# Altium PCB Ampl89038.PcbDoc
Units mm, origin at the board's own origin, x right, y up, seen from the top; angles counter-clockwise.
Board outline 20 x 20 mm, 2 copper layers (Top Layer, Bottom Layer), stack 1 mm thick; 13 components, 8 nets, 133 pads, 0 vias.
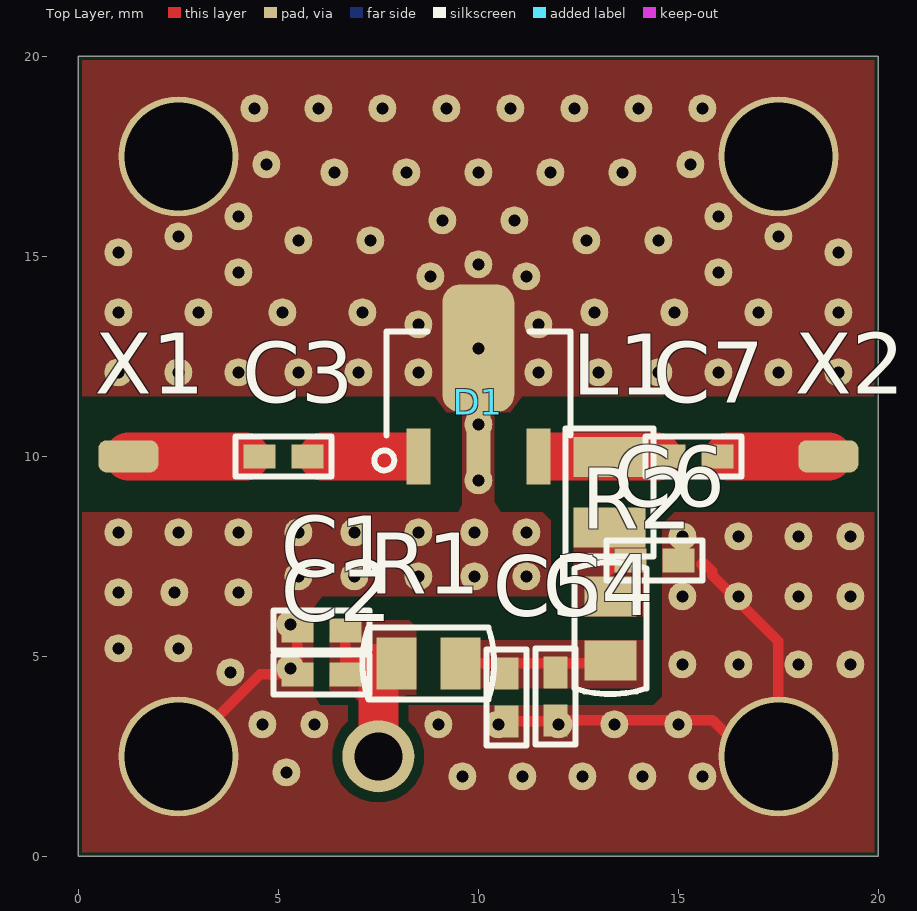
[diagram p0: Top Layer view]
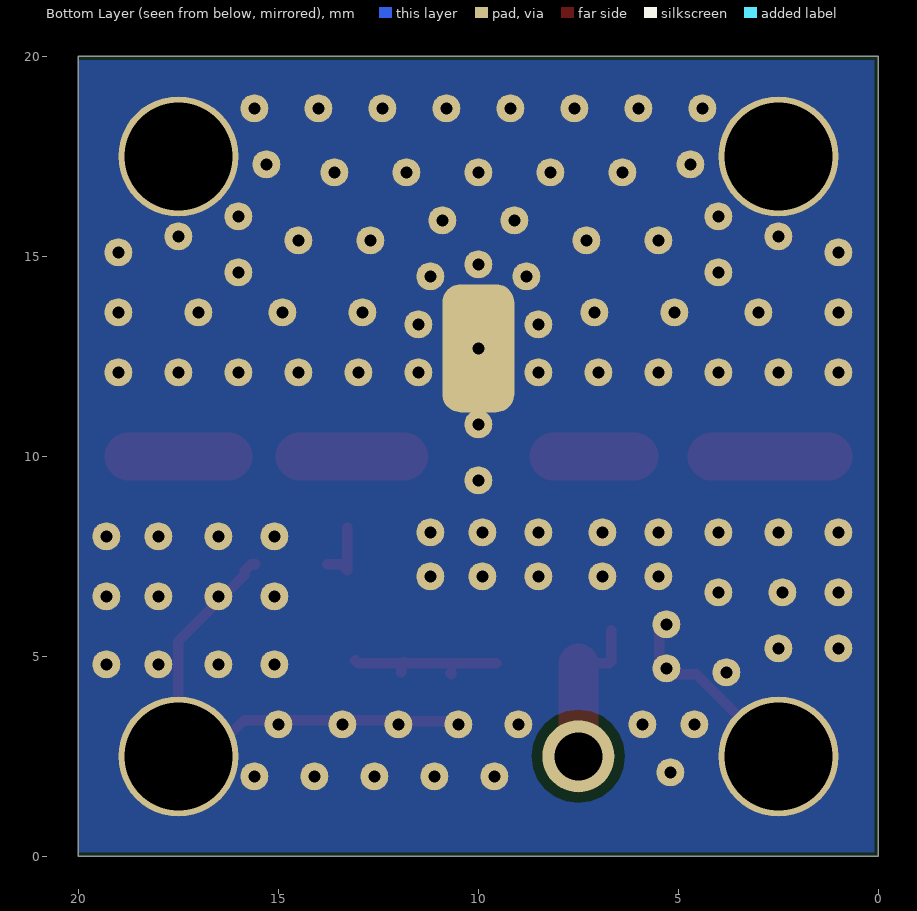
[diagram p1: Bottom Layer view, seen from below]

## Layer stack, top to bottom
Top Solder: solder mask 0.0102, Solder Resist, Dk 3.5
Top Layer: signal copper 0.05
Dielectric 1: dielectric 0.9, FR-4, Dk 4.8
Bottom Layer: signal copper 0.05
Bottom Solder: solder mask 0.0102, Solder Resist, Dk 3.5

## Board outline
0,0 0,20 20,20 20,0

## Design rules (kind name [scope] priority, off if disabled: settings)
AssemblyTestPointUsage AssemblyTestPointUsage_1 [All] p2:
AssemblyTestpoint AssemblyTestpoint_1 [All] p2: testpointundercomponent=TRUE minsize=1.016 maxsize=2.54 preferedsize=1.524 minholesize=0 maxholesize=1.016 preferedholesize=0.813 testpointgrid=0.025 usegrid=TRUE gridtolerance=0 allowsidetop=TRUE allowsidebottom=TRUE
Clearance [All] p1: gap=0.254 ignorepadtopadclearanceinfootprint=FALSE except(0: Arc-Hole Track-Hole SMDPad-Hole THPad-Hole Via-Hole Fill-Hole Poly-Hole Region-Hole Text-Hole)
Clearance Clearance_1 [All] p2: gap=0.254 ignorepadtopadclearanceinfootprint=FALSE except(0: Arc-Hole Track-Hole SMDPad-Hole THPad-Hole Via-Hole Fill-Hole Poly-Hole Region-Hole Text-Hole; 0.1: SMDPad-Poly SMDPad-Region THPad-Poly THPad-Region; 0.15: Track-Track Track-SMDPad SMDPad-SMDPad SMDPad-THPad SMDPad-Via THPad-THPad)
ComponentClearance ComponentClearance_1 [All] p2: gap=0.254 collisioncheckmode=3 verticalgap=0.254 showdistances=FALSE
DiffPairsRouting [All] p1: maxlimit=0.254 minlimit=0.254 mostfreqgap=0.254 substack1={E3139BEB-1D26-4D56-B641-86937DF22D5B} toplayer_{e3139beb-1d26-4d56-b641-86937df22d5b}_minwidth=0.381 toplayer_{e3139beb-1d26-4d56-b641-86937df22d5b}_maxwidth=0.381 toplayer_{e3139beb-1d26-4d56-b641-86937df22d5b}_prefwidth=0.381 bottomlayer_{e3139beb-1d26-4d56-b641-86937df22d5b}_minwidth=0.381 bottomlayer_{e3139beb-1d26-4d56-b641-86937df22d5b}_maxwidth=0.381 bottomlayer_{e3139beb-1d26-4d56-b641-86937df22d5b}_prefwidth=0.381 toplayer_minwidth=0.381 toplayer_maxwidth=0.381 toplayer_prefwidth=0.381 bottomlayer_minwidth=0.381 bottomlayer_maxwidth=0.381 bottomlayer_prefwidth=0.381 maxuncoupledlength=12.7
DiffPairsRouting DiffPairsRouting_1 [All] p2: maxlimit=0.254 minlimit=0.254 mostfreqgap=0.254 substack1={E3139BEB-1D26-4D56-B641-86937DF22D5B} toplayer_{e3139beb-1d26-4d56-b641-86937df22d5b}_minwidth=0.381 toplayer_{e3139beb-1d26-4d56-b641-86937df22d5b}_maxwidth=0.381 toplayer_{e3139beb-1d26-4d56-b641-86937df22d5b}_prefwidth=0.381 bottomlayer_{e3139beb-1d26-4d56-b641-86937df22d5b}_minwidth=0.381 bottomlayer_{e3139beb-1d26-4d56-b641-86937df22d5b}_maxwidth=0.381 bottomlayer_{e3139beb-1d26-4d56-b641-86937df22d5b}_prefwidth=0.381 toplayer_minwidth=0.381 toplayer_maxwidth=0.381 toplayer_prefwidth=0.381 bottomlayer_minwidth=0.381 bottomlayer_maxwidth=0.381 bottomlayer_prefwidth=0.381 maxuncoupledlength=12.7
FabricationTestPointUsage FabricationTestPointUsage_1 [All] p2: valid=0 allowmultiple=FALSE
FabricationTestpoint FabricationTestpoint_1 [All] p2: side=3 testpointundercomponent=TRUE minsize=1.016 maxsize=2.54 preferedsize=1.524 minholesize=0 maxholesize=1.016 preferedholesize=0.813 testpointgrid=0.025 allowsidetop=TRUE allowsidebottom=TRUE usegrid=TRUE gridtolerance=0
FanoutControl Fanout_LCC [IsLCC] p1: bgadir=Out bgaviamode=Centered fanoutstyle=Auto fanoutdirection=Alternating viagrid=0.025 // Fanout_LCC (Default Rule)
FanoutControl Fanout_BGA [IsBGA] p2: bgadir=Out bgaviamode=Centered fanoutstyle=Auto fanoutdirection=Alternating viagrid=0.025 // Fanout_BGA (Default Rule)
FanoutControl Fanout_Small [(CompPinCount < 5)] p3: bgadir=Out bgaviamode=Centered fanoutstyle=Auto fanoutdirection=OutThenIn viagrid=0.025 // Fanout_Small (Default Rule)
FanoutControl Fanout_SOIC [IsSOIC] p4: bgadir=Out bgaviamode=Centered fanoutstyle=Auto fanoutdirection=Alternating viagrid=0.025 // Fanout_SOIC (Default Rule)
FanoutControl Fanout_BGA_1 [IsBGA] p6: bgadir=Out bgaviamode=Centered fanoutstyle=Auto fanoutdirection=Alternating viagrid=0.025 // Fanout_BGA (Default Rule)
FanoutControl Fanout_LCC_1 [IsLCC] p7: bgadir=Out bgaviamode=Centered fanoutstyle=Auto fanoutdirection=Alternating viagrid=0.025 // Fanout_LCC (Default Rule)
FanoutControl Fanout_SOIC_1 [IsSOIC] p8: bgadir=Out bgaviamode=Centered fanoutstyle=Auto fanoutdirection=Alternating viagrid=0.025 // Fanout_SOIC (Default Rule)
FanoutControl Fanout_Small_1 [(CompPinCount < 5)] p9: bgadir=Out bgaviamode=Centered fanoutstyle=Auto fanoutdirection=OutThenIn viagrid=0.025 // Fanout_Small (Default Rule)
FanoutControl Fanout_Default_1 [All] p10: bgadir=Out bgaviamode=Centered fanoutstyle=Auto fanoutdirection=Alternating viagrid=0.025 // Fanout_Default (Default Rule)
Height Height_1 [All] p2: minheight=0 maxheight=25.4 prefheight=12.7
HoleSize HoleSize_1 [All] p2: absolutevalues=TRUE maxlimit=2.54 minlimit=0.025 maxpercent=80.000 minpercent=20.000
HoleToHoleClearance HoleToHoleClearance_1 [All] p2: gap=0.254 allowstackedmicrovias=TRUE
LayerPairs LayerPairs_1 [All] p2: enforce=TRUE
MinimumSolderMaskSliver MinimumSolderMaskSliver_1 [All] p2: minsoldermaskwidth=0.254
NetAntennae NetAntennae_1 [All] p2: netantennaetolerance=0
PasteMaskExpansion PasteMaskExpansion_1 [All] p2: expansion=0
PlaneClearance PlaneClearance_1 [All] p2: clearance=0.8
PlaneConnect [All] p1: planeconnectstyle=Direct reliefexpansion=0.508 reliefentries=4 reliefconductorwidth=0.254 reliefairgap=0.254
PlaneConnect PlaneConnect_1 [All] p2: planeconnectstyle=Direct reliefexpansion=0.508 reliefentries=4 reliefconductorwidth=0.254 reliefairgap=0.254
PolygonConnect [All] p1: connectstyle=Direct reliefconductorwidth=0.254 reliefentries=4 polygonreliefangle="90 Angle" airgapwidth=0.254
PolygonConnect PolygonConnect_1 [All] p2: connectstyle=Direct reliefconductorwidth=0.254 reliefentries=4 polygonreliefangle="90 Angle" airgapwidth=0.254
RoutingCorners RoutingCorners_1 [All] p2: cornerstyle=45-Degree minsetback=2.54 maxsetback=2.54
RoutingLayers RoutingLayers_1 [All] p2: top layer_v5=TRUE bottom layer_v5=TRUE
RoutingPriority RoutingPriority_1 [All] p2: routingpriority=0
RoutingTopology RoutingTopology_1 [All] p2: topology=Shortest
RoutingVias [All] p1: holewidth=0.711 width=1.27 viastyle="Through Hole" minholewidth=0.711 minwidth=1.27 maxholewidth=0.711 maxwidth=1.27
RoutingVias RoutingVias_1 [All] p2: holewidth=0.711 width=1.27 viastyle="Through Hole" minholewidth=0.711 minwidth=1.27 maxholewidth=0.711 maxwidth=1.27
ShortCircuit ShortCircuit_1 [All] p2: allowed=FALSE
SilkToBoardRegionClearance SilkToBoardRegionClearance_1 [All] p2:
SilkToSilkClearance SilkToSilkClearance_1 [All] p2: silktosilkclearance=0.254
SilkToSolderMaskClearance SilkToSolderMaskClearance_1 [IsPad] p2: minsilkscreentomaskgap=0.254 clearancetoexposedcopper=TRUE
SolderMaskExpansion [All] p1: expansion=0.102 istentingtop=FALSE
SolderMaskExpansion SolderMaskExpansion_1 [All] p2: expansion=0.102 istentingtop=FALSE
UnRoutedNet UnRoutedNet_1 [All] p2:
UnpouredPolygon UnpouredPolygon_1 [All] p2:
Width [All] p1: maxlimit=1.254 minlimit=0.254 preferedwidth=0.254 substack1={E3139BEB-1D26-4D56-B641-86937DF22D5B}
Width Width_08 [All] p2 off: maxlimit=0.8 minlimit=0.8 preferedwidth=0.8 substack1={E3139BEB-1D26-4D56-B641-86937DF22D5B}
Width Width_1 [All] p3 off: maxlimit=0.254 minlimit=0.254 preferedwidth=0.254 substack1={E3139BEB-1D26-4D56-B641-86937DF22D5B} checkconnectedcopper=TRUE
24 further rules are at their usual default settings.

## Components (designator, comment, footprint, x,y, rotation, side; value= is the part's Value field where it differs from the comment)
C1 "1000" CAPC1005N 6.075,5.65 r0 top value={Value}
C2 "10" CAPC1005N 6.075,4.55 r0 top value={Value}
C3 "1000" CAPC1005N 5.125,10 r0 top value={Value}
C4 "1000" CAPC1005N 11.925,4 r90 top value={Value}
C5 "10" CAPC1005N 10.7,3.975 r90 top value={Value}
C6 "1000" CAPC1005N 14.4,7.4 r180 top value={Value}
C7 "1000" CAPC1005N 15.375,10 r0 top value={Value}
D1 "SBB2089Z" SOT89-150P400X160-3N 10,11.8 r90 top
L1 "" INDC2012X16N 13.275,9.1 r90 top
R1 "15" RESC2012L 8.75,4.825 r0 top value={Value}
R2 "15" RESC2012L 13.3,5.7 r90 top value={Value}
X1 "22_SMA-50-0-15/111_NE" TP0.8X1.5 1.25,10 r0 top
X2 "22_SMA-50-0-15/111_NE" TP0.8X1.5 18.75,10 r0 top

## Footprints (in the part's own frame and the unit in brackets; to place one, negate y for a bottom-side part, rotate by r counter-clockwise, add the part's x,y. Pads: shape width x height; smd on the part's side, far side on the other; paste and mask are expansions set on the pad)
CAPC1005N [mm] "Chip Capacitor, Body 1.0x0.5mm, IPC Medium Density"
  rect 0.8x0.6 smd: 1(-0.6,0) 2(0.6,0)
  Top Layer pour cut-out: -0.2,0.5 -0.2,-0.5 0.2,-0.5 0.2,0.5
  silkscreen extent -1.2,-0.5 1.2,0.5, body extent -0.55,-0.3 0.55,0.3, height 0.6
INDC2012X16N [mm] "Chip Inductor, 2-Leads, Body 2,29x1,91mm, IPC Medium Density"
  rect 1x1.8 smd: 1(-0.88,0) 2(0.88,0)
  Top Layer pour cut-out: -0.4,0.9 -0.4,-0.9 0.4,-0.9 0.4,0.9
  silkscreen extent -1.6,-1.1 1.6,1.1, body extent -1.15,-0.95 1.14,0.96, height 1.6
RESC2012L [mm] "Chip Resistor, Body 2.0x1.3mm, IPC High Density"
  rect 1x1.3 smd: 1(-0.8,0) 2(0.8,0)
  Top Layer pour cut-out: -0.3,0.9 -0.3,-0.9 0.3,-0.9 0.3,0.9
  silkscreen extent -1.65,-0.9 1.65,0.9, body extent -1.07,-0.7 1.07,0.7, height 0.65
SOT89-150P400X160-3N [mm] "SOT89, 3-Leads, Body 4,50x2,50mm, Pitch 1,50mm, Lead Span 4,0mm, IPC Medium Density"
  rect 1.4x0.6 smd: 1(-1.8,1.5) 3(-1.8,-1.5)
  rect 1.8x0.6 smd: 2(-1.6,0)
  rrect50% 3.2x1.8 hole 0.3: 4(0.9,0)
  silkscreen extent -2.15,-2.3 1.32,2.6, body extent -2.12,-2.25 1.88,2.25, height 1.5
TP0.8X1.5 [mm]
  rrect50% 1.5x0.8 smd paste-25.4: 1(0,0)

## Part data
C1 C2 C3 C4 C5 C6 C7: library part C0402, "Чип-конденсатор", Power/Voltage={Voltage}, Tolerance={Tolerance}, Name=0402, TKE/TKC={TKE/TKC}, Type=Конденсатор
D1: "0.05-6 GHz Amplifier", Manufacturer=RFMD, Package=SOT89, ManufacturerPartNumber=SBB2089Z, Type=Микросхема
L1: library part L0805CS, "Индуктивность без магнитопровода", Manufacturer=Coilcraft, ManufacturerPartNumber=0805CS, Name=0805, Type=Индуктивность
R1 R2: library part R0805, "Чип-резистор", Tolerance={Tolerance}, Name=0805, Type=Резистор
X1 X2: "Розетка герметичная", Manufacturer=HUBER+SUHNER, ManufacturerPartNumber=22_SMA-50-0-15/111_NE, Type=Розетка

## Free pads (board coordinates)
  round 3 hole 2.7: 0(2.5,17.5) 1(2.5,2.5) 5(17.5,2.5) 6(17.5,17.5)
  round 1.8 hole 1.2: 9(7.5,2.5)
  round 0.7 hole 0.3: 10(1,5.2) 10(1,6.6) 10(1,8.1) 10(1,12.1) 10(1,13.6) 10(1,15.1) 10(2.4,6.6) 10(2.5,5.2) 10(2.5,8.1) 10(2.5,12.1) 10(2.5,15.5) 10(3,13.6) 10(3.8,4.6) 10(4,6.6) 10(4,8.1) 10(4,12.1) 10(4,14.6) 10(4,16) 10(4.4,18.7) 10(4.6,3.3) 10(4.7,17.3) 10(5.1,13.6) 10(5.2,2.1) 10(5.3,4.7) 10(5.3,5.8) 10(5.5,7) 10(5.5,8.1) 10(5.5,12.1) 10(5.5,15.4) 10(5.9,3.3) 10(6,18.7) 10(6.4,17.1) 10(6.9,7) 10(6.9,8.1) 10(7,12.1) 10(7.1,13.6) 10(7.3,15.4) 10(7.6,18.7) 10(8.2,17.1) 10(8.5,7) 10(8.5,8.1) 10(8.5,12.1) 10(8.5,13.3) 10(8.8,14.5) 10(9,3.3) 10(9.1,15.9) 10(9.2,18.7) 10(9.6,2) 10(9.9,7) 10(9.9,8.1) 10(10,9.4) 10(10,10.8) 10(10,14.8) 10(10,17.1) 10(10.5,3.3) 10(10.8,18.7) 10(10.9,15.9) 10(11.1,2) 10(11.2,7) 10(11.2,8.1) 10(11.2,14.5) 10(11.5,12.1) 10(11.5,13.3) 10(11.8,17.1) 10(12,3.3) 10(12.4,18.7) 10(12.6,2) 10(12.7,15.4) 10(12.9,13.6) 10(13,12.1) 10(13.4,3.3) 10(13.6,17.1) 10(14,18.7) 10(14.1,2) 10(14.5,12.1) 10(14.5,15.4) 10(14.9,13.6) 10(15,3.3) 10(15.1,4.8) 10(15.1,6.5) 10(15.1,8) 10(15.3,17.3) 10(15.6,2) 10(15.6,18.7) 10(16,12.1) 10(16,14.6) 10(16,16) 10(16.5,4.8) 10(16.5,6.5) 10(16.5,8) 10(17,13.6) 10(17.5,12.1) 10(17.5,15.5) 10(18,4.8) 10(18,6.5) 10(18,8) 10(19,12.1) 10(19,13.6) 10(19,15.1) 10(19.3,4.8) 10(19.3,6.5) 10(19.3,8)

## Nets (pads, with @x,y where several pads share a name; then routed paths per layer and width w, separated by ;. In a path a pad name is that pad's centre, name@x,y a point inside that pad or via, vN(x,y) a via of type N, cw(c..) or ccw(c..) an arc to the next point about the centre after c; other vN are vias at no path point)
GND: C1.1 C2.1 C4.1 C5.1 C6.1 D1.2 D1.4 pad.0 pad.1 pad.5 pad.6 pad.10 | length 18.7
  Top Layer w0.254: pad.0@1.817,16.817 pad.0 ; pad.1 4.55,4.55 C2.1 C1.1 ; C5.1 11.9,3.375 C4.1 15.857,3.4 16.757,2.5 pad.5 17.5,5.375 15.848,7.027 15.848,7.127 15.675,7.3 15.575,7.3
NetC1_2: C1.2 C2.2 pad.9 R1.1 | length 3.9
  Top Layer w0.254: C1.2 6.675,4.875 6.725,4.825 R1.1@7.5,4.825
  Top Layer w1: pad.9 R1.1@7.5,4.825
NetC3_1: C3.1 X1.1 | length 2.9
  Top Layer w1.2: X1.1 C3.1@4.175,10
NetC3_2: C3.2 D1.1 | length 2
  Top Layer w1.2: C3.2@6.1,10 8.125,10
NetC4_2: C4.2 C5.2 R1.2 R2.1 | length 3.9
  Top Layer w0.254: R1.2 C4.2@11.9,4.825 ; C5.2@10.675,4.55 10.675,4.6 C5.2 ; C4.2@11.875,4.85 C4.2@11.9,4.825 ; C4.2 11.925,4.8 C4.2@11.9,4.825 ; R2.1@13.075,4.9 13,4.825 C4.2@11.9,4.825
NetC6_2: C6.2 L1.1 R2.2 | length 1.6
  Top Layer w0.254: L1.1 13.275,7.15 13.425,7.3 C6.2@13.775,7.3
NetC7_1: C7.1 D1.3 L1.2 | length 3
  Top Layer w0.254: D1.3 11.85,10 ; L1.2@13.268,9.987 L1.2@13.281,10
  Top Layer w1.2: 11.863,10 L1.2@13.268,10 ; L1.2@13.281,10 C7.1@14.475,10
NetC7_2: C7.2 X2.1 | length 2.5
  Top Layer w1.2: C7.2@16.25,10 X2.1

## Polygon pours and split planes (outlines as drawn)
NetC6_2 on Top Layer "NONET_L01_P-001" (solid, pour order 11): 12.375,8.7 12.385,8.69 12.385,6 14.175,6 14.175,6.725 14.175,8.7
NetC4_2 on Top Layer "NONET_L01_P-001" (solid, pour order 10): 13.7,5.4 12.2,5.4 9.9,5.4 9.9,4.2 14.1,4.2 14.175,4.325 14.175,5.4
GND on Top Layer "NONET_L01_P-001" (solid, pour order 7): 0.1,8.6 9.5,8.6 9.6,8.8 9.6,11.1 10.4,11.1 10.4,8.86 10.562,8.6 11.612,8.6 11.812,8.4 11.812,6.5 6.1,6.5 5.875,6.2 5.875,4.05 6.052,3.775 14.375,3.775 14.6,4 14.6,8.3 14.9,8.6 19.9,8.6 19.9,0.1 0.1,0.1
NetC1_2 on Top Layer "NONET_L01_P-001" (solid, pour order 9): 6.3,5.9 8.275,5.9 8.5,5.675 8.5,3.975 8.425,3.9 6.4,3.9 6.275,4.025 6.275,4.05
GND on Top Layer "NONET_L01_P-001" (solid, pour order 8): 0.1,19.9 0.3,19.9 19.9,19.9 19.9,11.5 11.1,11.5 10.8,11.1 9.2,11.1 8.9,11.5 0.1,11.5
GND on Bottom Layer "Bottom Layer-No Net" (solid, pour order 6): 0.1,19.9 0.1,0.1 20,0.1 20,19.9

## Silkscreen, mask and mechanical layers (free items; w line width, h text height)
Top Solder:
  rectangle: 2.8,8.4 17.2,11.6
  region: 3,20 0,20 0,0 3,0
  region: 5.5,20 2.5,20 2.5,14.5 5.5,14.5
  region: 5.5,5.5 2.5,5.5 2.5,0 5.5,0
  rectangle: 14.5,14.5 17.5,20
  rectangle: 14.5,0 17.5,5.5
  rectangle: 17,0 20,20
Bottom Solder:
  rectangle: 0,0 20.1,20
Mechanical 3:
  lines w0.05: 0.1,0.1 0.1,19.9
Mechanical 4:
  lines w0.254: 0.1,0.1 0.1,19.9 19.9,19.9 19.9,0.1 0.1,0.1
Mechanical 5:
  circle w0.254: c2.5,7.5 r1.25
  circle w0.254: c7.5,7.5 r1.25
  circle w0.254: c12.5,12.5 r1.25
  circle w0.254: c12.5,7.5 r1.25
  circle w0.254: c12.5,17.5 r1.25
  circle w0.254: c7.5,2.5 r1.25
  circle w0.254: c7.5,12.5 r1.25
  circle w0.254: c7.5,17.5 r1.25
  circle w0.254: c12.5,2.5 r1.25
  circle w0.254: c2.5,2.5 r1.25
  circle w0.254: c2.5,17.5 r1.25
  circle w0.254: c17.5,12.5 r1.25
  circle w0.254: c17.5,7.5 r1.25
  circle w0.254: c17.5,2.5 r1.25
  circle w0.254: c17.5,17.5 r1.25
  circle w0.254: c2.5,12.5 r1.25

## Text inside footprints (layer, text, board x,y; h text height)
D1: Test Points Bottom "Необходима прошивка, см. pdf" at 7,8.9 h1.2 r90